# EAGLE board Patrick-PCB (EAGLE 9.6.0)
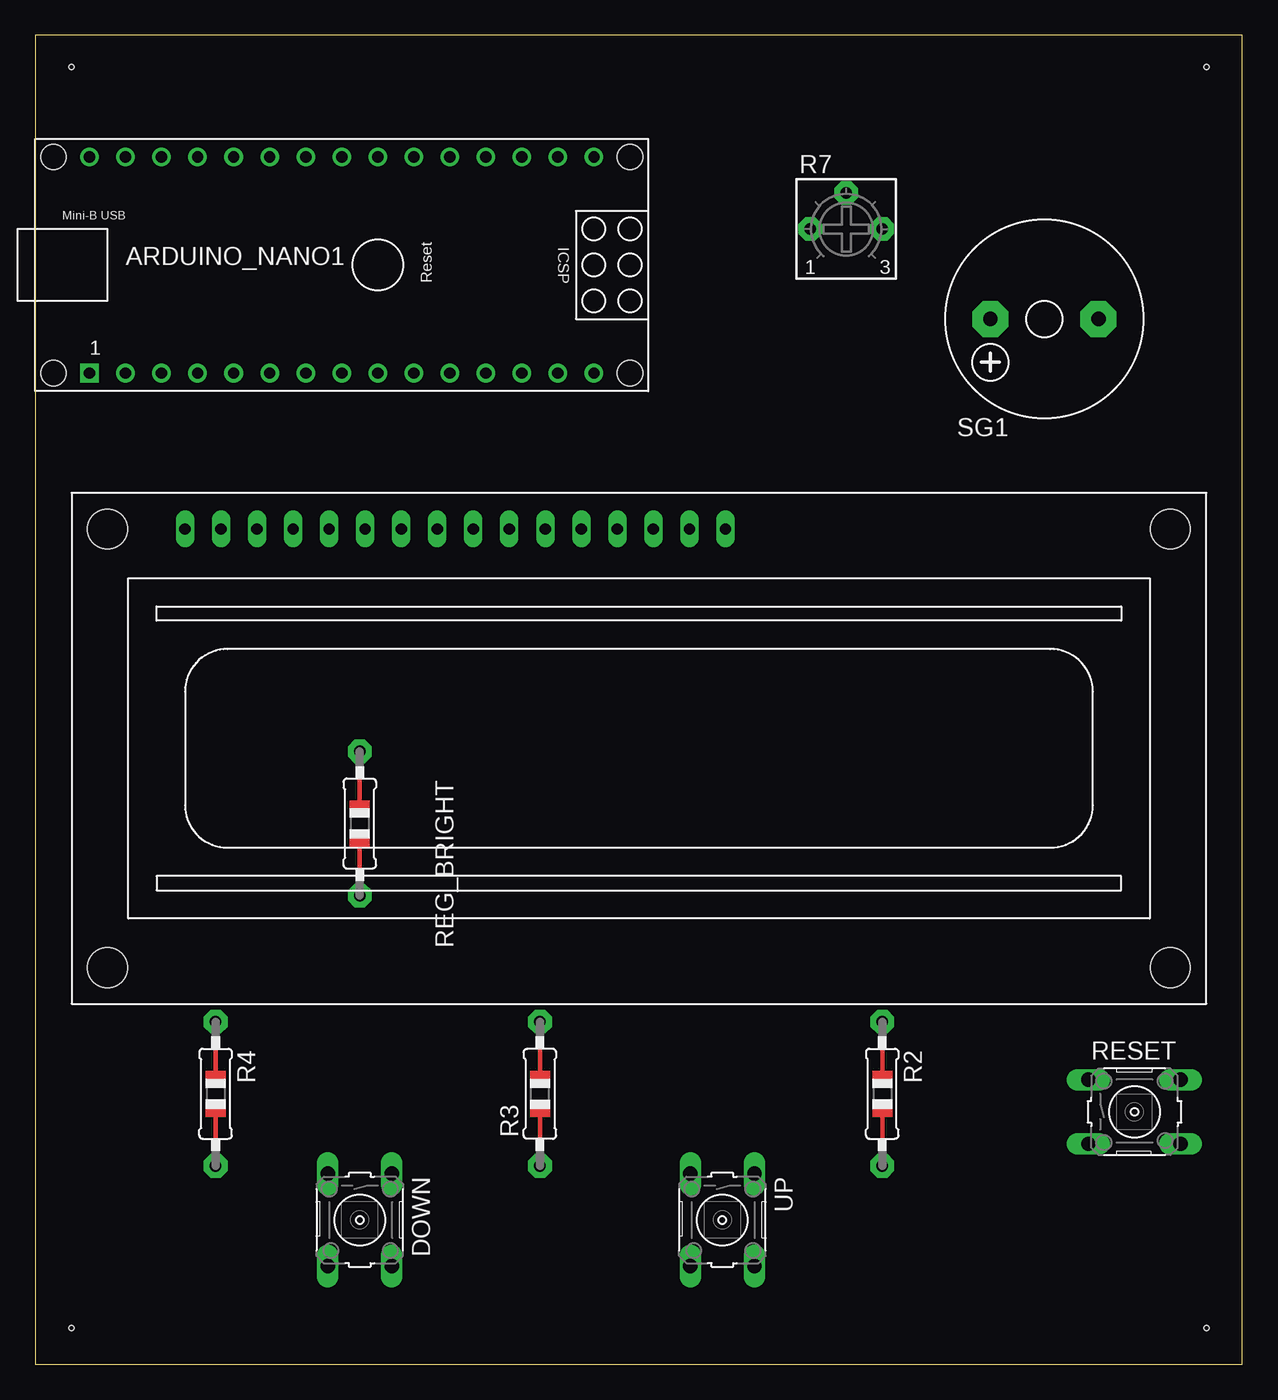
[diagram p0: board, top side]
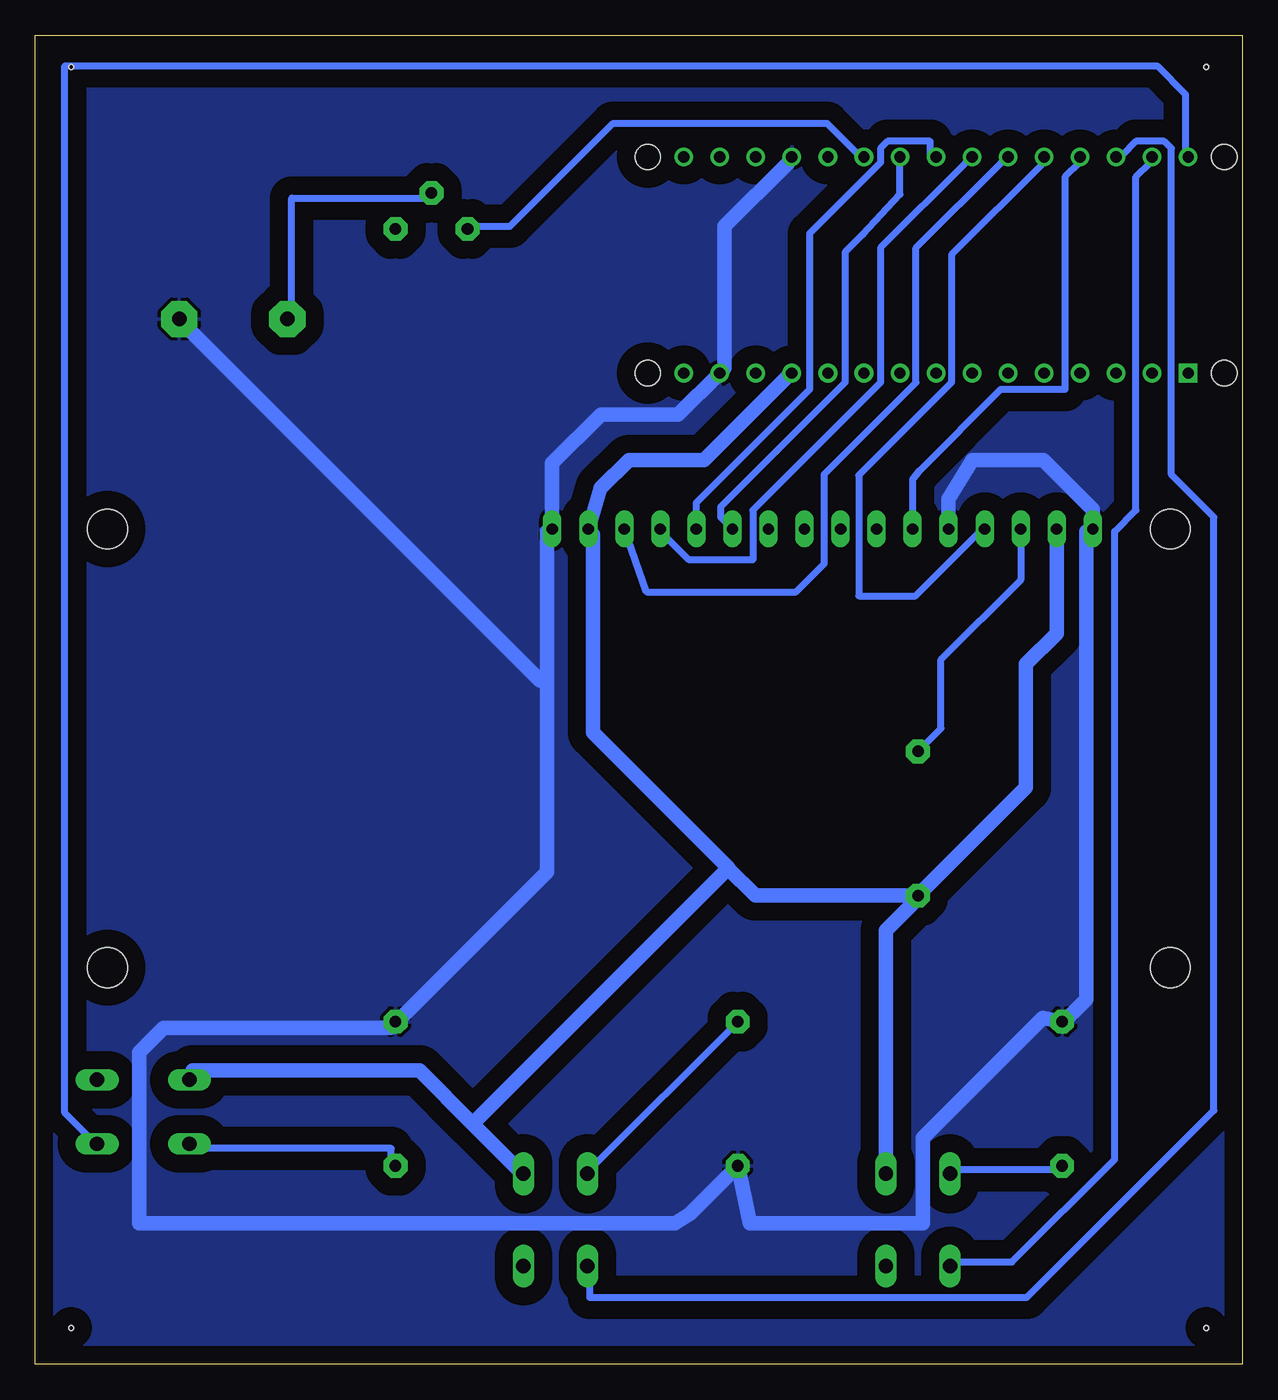
[diagram p1: board, bottom side, seen from below]

Size 85.07 x 93.65 mm. Coordinates in mm from the lower left corner, seen from the top.
Outline: 0,0 85.07,0 85.07,93.65 0,93.65 0,0
Copper layers (1*16): Top 0.035mm / dielectric 1.5mm / Bottom 0.035mm
Design rules "default": minimum track width 6mil, minimum drill 0.35mm, track to track 6mil, track to pad 6mil, pad to pad 6mil, via to via 6mil, smd to smd 6mil, copper to edge 40mil, drill to drill 6mil, minimum pad ring 10mil, minimum via ring 8mil, stop-mask expansion 4mil, vias tented up to drill 0mil, thermal gap 10mil
Net classes: 0 default: width 0.508 mm; 1 Alimentacao: width 1.016 mm
Holes 0.35 mm at 2.54,91.44 2.54,2.54 82.55,2.54 82.55,91.44

## Footprints (pad centres in the part's own frame; a part is rotated, then mirrored left to right if it is on the bottom)
ARDUINO_NANO = drill 0.8 square: 1 -20.32,-7.62 | drill 0.8: 2 -17.78,-7.62; 3 -15.24,-7.62; 4 -12.7,-7.62; 5 -10.16,-7.62; 6 -7.62,-7.62; 7 -5.08,-7.62; 8 -2.54,-7.62; 9 0,-7.62; 10 2.54,-7.62; 11 5.08,-7.62; 12 7.62,-7.62; 13 10.16,-7.62; 14 12.7,-7.62; 15 15.24,-7.62; 16 15.24,7.62; 17 12.7,7.62; 18 10.16,7.62; 19 7.62,7.62; 20 5.08,7.62; 21 2.54,7.62; 22 0,7.62; 23 -2.54,7.62; 24 -5.08,7.62; 25 -7.62,7.62; 26 -10.16,7.62; 27 -12.7,7.62; 28 -15.24,7.62; 29 -17.78,7.62; 30 -20.32,7.62 | hole 1.778: -22.86,-7.62; -22.86,7.62; 17.78,7.62; 17.78,-7.62
B3F-10XX = drill 1.016 long: 1 -3.251,2.261; 2 3.251,2.261; 3 -3.251,-2.261; 4 3.251,-2.261
0805-THM = drill 0.813 pad 1.676 octagon: 1 -5.08,0; 2 5.08,0
3362P = drill 0.813 pad 1.676 octagon: 1 -2.54,0; 2 0,2.54; 3 2.54,0
F/CM12P = drill 1.016 pad 2.54 octagon: + 3.81,0; - -3.81,0
LCD1602 = drill 0.8 long: 1 8,33.46; 2 10.54,33.46; 3 13.08,33.46; 4 15.62,33.46; 5 18.16,33.46; 6 20.7,33.46; 7 23.24,33.46; 8 25.78,33.46; 9 28.32,33.46; 10 30.86,33.46; 11 33.4,33.46; 12 35.94,33.46; 13 38.48,33.46; 14 41.02,33.46; 15 43.56,33.46; 16 46.1,33.46 | hole 2.8: 2.54,2.54; 2.54,33.46; 77.46,33.46; 77.46,2.54

## Placement (x,y rotation side)
ARDUINO_NANO1  [ARDUINO_NANO]  24.13,77.47 0 top
DOWN  [B3F-10XX]  22.86,10.16 270 top
R2  [0805-THM]  59.69,19.05 270 top
R3  [0805-THM]  35.56,19.05 90 top
R4  [0805-THM]  12.7,19.05 270 top
R7  [3362P]  57.15,80.01 0 top
REG_BRIGHT  [0805-THM]  22.86,38.1 270 top
RESET  [B3F-10XX]  77.47,17.78 0 top
SG1  F/CM12P  [F/CM12P]  71.12,73.66 180 top
UP  [B3F-10XX]  48.42,10.16 270 top
X1  HD44780LCD-1602  [LCD1602]  2.54,25.4 0 top

## Library data of the parts
ARDUINO_NANO1 = ArduinoNanoV30
DOWN RESET UP = switch-omron; MPN: B3F-1000; OC_FARNELL: 176432; OC_NEWARK: 36M3542
R2-R4 REG_BRIGHT X1 = adafruit
R7 = bourns
SG1 = buzzer; OC_FARNELL: unknown; OC_NEWARK: unknown

## Nets
GND [Alimentacao]: ARDUINO_NANO1.14 ARDUINO_NANO1.19 R2.1 R3.1 R4.1 SG1.- X1.1 X1.5 X1.16
N$1: REG_BRIGHT.1 X1.3
N$2: ARDUINO_NANO1.28 UP.4
N$3: ARDUINO_NANO1.29 DOWN.4
N$4: R3.2 UP.3
N$5: DOWN.3 R4.2
N$6: R2.2 RESET.3
N$7: ARDUINO_NANO1.30 RESET.4
N$8: ARDUINO_NANO1.27 X1.6
N$9: ARDUINO_NANO1.26 X1.4
N$10: ARDUINO_NANO1.25 X1.14
N$11: ARDUINO_NANO1.24 X1.13
N$12: ARDUINO_NANO1.23 X1.12
N$13: ARDUINO_NANO1.22 X1.11
N$15: ARDUINO_NANO1.21 R7.1
N$16: R7.2 SG1.+
VCC [Alimentacao]: ARDUINO_NANO1.12 DOWN.1 REG_BRIGHT.2 RESET.1 UP.1 X1.2 X1.15
VIN [Alimentacao]: ARDUINO_NANO1.15

## Tracks (layer width: path | path; a pad name or v marks a point on that pad's centre or on a via)
GND
  Bottom 1.016: X1.5 20.7,60.96 19.02,63.73 14.04,63.73 10.54,60.23 X1.1 11,58.69 11,25.69 12.5,24.19 R4.1 14.06,24.4 22.5,15.96 22.5,9.92 34.69,9.92 R3.1 38.94,10.59 39.99,9.92 77.77,9.92 77.77,21.96 76.04,23.69 60,23.69 R2.1 59.5,24.19 49,34.69 49,48.19 | ARDUINO_NANO1.19 32,84.69 36.5,80.19 36.5,70.19 ARDUINO_NANO1.14 39.76,66.92 45.22,66.92 48.64,63.5 X1.16 49,58.69 49,48.19 | SG1.- 74.5,73.19 49.5,48.19 49,48.19
  pour Bottom (isolate 1.27): 0,93.98 85.09,93.98 85.09,0 0,0
N$1
  Bottom 0.508: X1.3 15.62,55.26 21.23,49.65 21.23,44.81 REG_BRIGHT.1
N$2
  Bottom 0.508: ARDUINO_NANO1.28 8.5,85.19 7.5,86.19 5.5,86.19 5,85.69 5,62.69 2,59.69 2,17.88 15.19,4.69 46,4.69 46,6.69 UP.4
N$3
  Bottom 0.508: ARDUINO_NANO1.29 6.5,84.69 7.5,83.69 7.5,60.19 9,58.69 9,14.42 16.23,7.19 20.5,7.19 DOWN.4
N$4
  Bottom 0.508: R3.2 46,13.69 UP.3
N$5
  Bottom 0.508: DOWN.3 20.5,13.69 13,13.69 R4.2
N$6
  Bottom 0.508: RESET.3 74,15.19 60,15.19 60,14.19 R2.2
N$7
  Bottom 0.508: ARDUINO_NANO1.30 4,85.19 4,89.5 6,91.5 83,91.5 83,17.69 81,15.69 RESET.4
N$8
  Bottom 0.508: X1.6 23.24,62.31 22.77,62.96 17.04,68.69 12.5,68.69 12.5,83.69 11.5,84.69 ARDUINO_NANO1.27
N$9
  Bottom 0.508: X1.4 18.5,58.69 23.04,54.15 27.04,54.15 27.04,62.65 20.5,69.19 20.5,78.19 14,84.69 ARDUINO_NANO1.26
N$10
  Bottom 0.508: 41.99,54.42 31.46,54.42 29.46,56.42 29.46,62.73 23,69.19 23,78.69 17,84.69 ARDUINO_NANO1.25 | 41.99,54.42 | 41.99,54.42 X1.14
N$11
  Bottom 0.508: X1.13 41,58.69 39,56.69 34.5,56.69 34.5,60.19 25.5,69.19 25.5,78.69 19.5,84.69 ARDUINO_NANO1.24
N$12
  Bottom 0.508: X1.12 38.48,60.71 30.5,68.69 30.5,79.69 25.5,84.69 25.5,85.69 25,86.19 22,86.19 22,85.19 ARDUINO_NANO1.23
N$13
  Bottom 0.508: X1.11 36.77,59.69 36.77,60.42 28,69.19 28,78.37 26.73,79.64 24.13,82.45 ARDUINO_NANO1.22
N$15
  Bottom 0.508: ARDUINO_NANO1.21 27,85.19 29.27,87.46 44.35,87.46 51.62,80.19 54.5,80.19 R7.1
N$16
  Bottom 0.508: R7.2 57.5,82.19 67,82.19 67,73.69 SG1.+
VCC
  Bottom 1.016: 54.25,16.94 58,20.69 74,20.69 74,20.19 RESET.1 | 54.25,16.94 51,13.69 UP.1 | ARDUINO_NANO1.12 32,69.69 37.96,63.73 43.23,63.73 45.23,61.73 X1.15 46,58.69 45.77,58.46 45.77,44.53 36.22,34.97 36.25,34.94 | X1.2 13.08,51.5 15.24,49.34 15.24,40.64 REG_BRIGHT.2 | DOWN.1 25.12,30.57 23,32.69 REG_BRIGHT.2 | 36.25,34.94 34.33,33.02 REG_BRIGHT.2 | 36.25,34.94 54.25,16.94